# EAGLE board Battery Button Board (EAGLE 8.0.2)
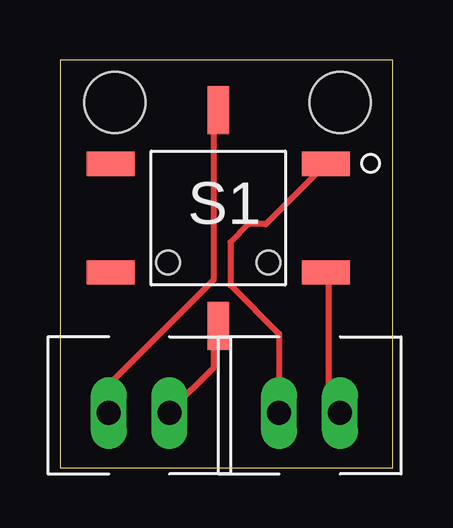
[diagram p0: board, top side]
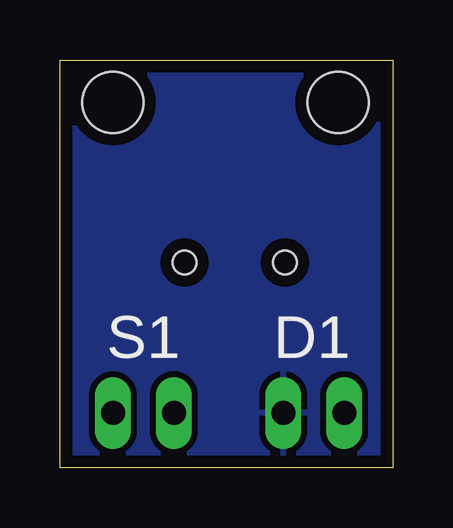
[diagram p1: board, bottom side, seen from below]

Size 13.89 x 17.01 mm. Coordinates in mm from the lower left corner, seen from the top.
Outline: 0,0 13.89,0 13.89,17.01 0,17.01 0,0
Copper layers (1*16): Top 0.035mm / dielectric 1.6mm / Bottom 0.035mm
Design rules "Elecrow_2-layer_PCB_eagle_rule": minimum track width 6mil, minimum drill 12mil, track to track 6mil, track to pad 6mil, pad to pad 6mil, via to via 8mil, smd to smd 0mil, copper to edge 20mil, drill to drill 10mil, minimum pad ring 6mil, minimum via ring 6mil, stop-mask expansion 0mil, vias tented up to drill 100mil, thermal gap 10mil
Holes 2.54 mm at 2.29,15.24 11.68,15.24

## Footprints (pad centres in the part's own frame; a part is rotated, then mirrored left to right if it is on the bottom)
XH_CONNECTOR = drill 1 long: 1 -1.27,0; 2 1.27,0
LED_TACT_SWITCH = smd 1.999 x 1.001: 1 4.496,2.261; 2 -4.496,2.261; 3 4.496,-2.261; 4 -4.496,-2.261 | smd 0.889 x 1.999: 5 0,-4.496; 6 0,4.496 | hole 0.991: -2.095,-1.854; 2.095,-1.854

## Placement (x,y rotation side)
D1  [XH_CONNECTOR]  3.3,2.29 0 top
S1  SWITCH_CONNECTOR  [XH_CONNECTOR]  10.41,2.29 0 top
U$1  LED_TACT_SWITCH  [LED_TACT_SWITCH]  6.6,10.41 0 top

## Library data of the parts
D1 S1 U$1 = thanics_robotics

## Nets
GND: D1.2 U$1.5
N$1: D1.1 U$1.6
N$3: S1.1 U$1.1
N$4: S1.2 U$1.3

## Tracks (layer width: path | path; a pad name or v marks a point on that pad's centre or on a via)
GND
  Top 0.254: U$1.5 6.43,5.79 6.43,4.19 4.6,2.36 D1.2
  pour Bottom (isolate 0.254): 0,17.02 13.97,17.02 13.97,0 0,0
N$1
  Top 0.254: U$1.6 6.43,14.71 6.43,7.85 2.08,3.51 2.08,2.36 D1.1
N$3
  Top 0.254: U$1.1 8.58,10.16 7.87,10.16 7.11,9.4 7.11,7.62 9.14,5.59 S1.1
N$4
  Top 0.254: U$1.3 11.23,8.08 11.23,2.82 11.68,2.36 S1.2

## Text on the board
tNames: S1
bNames: D1 | S1